# Altium PCB Proto_buttons.PcbDoc
Units mm, origin at the board's own origin, x right, y up, seen from the top; angles counter-clockwise.
Board outline 150 x 40 mm, 4 copper layers (Top Layer, Layer 2, Layer 3, Bottom Layer), stack 1.511 mm thick; 51 components, 24 nets, 166 pads, 29 vias.
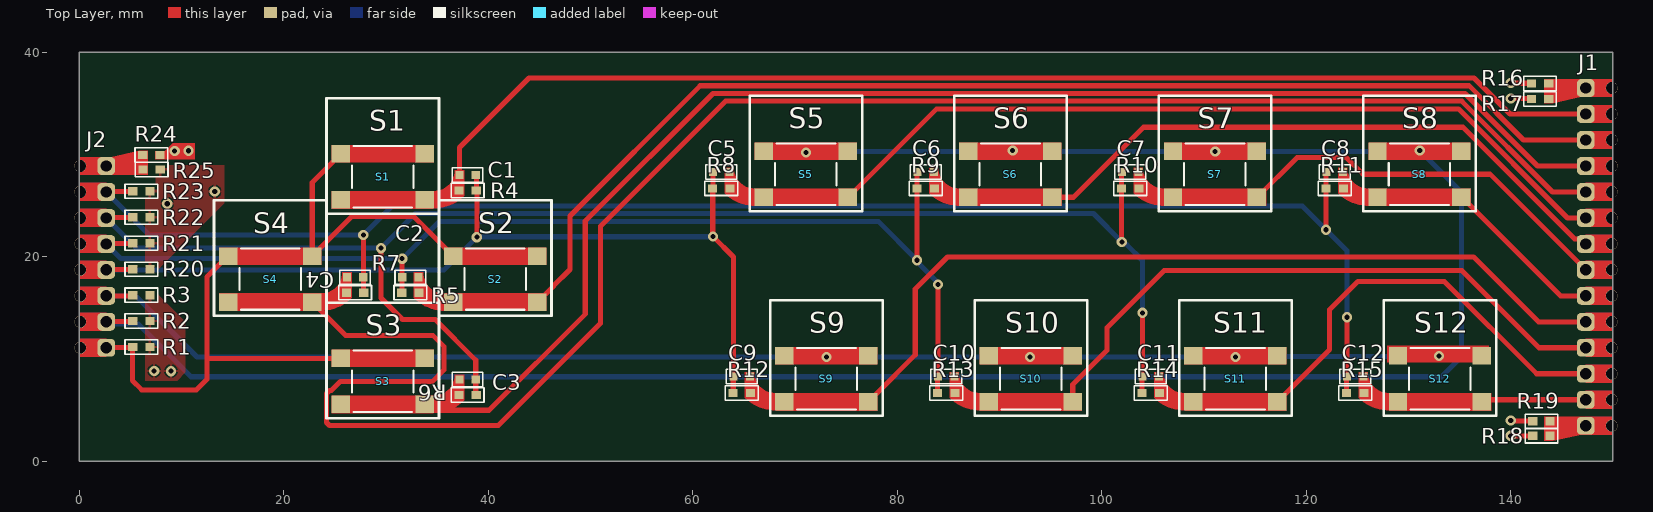
[diagram p0: Top Layer view]
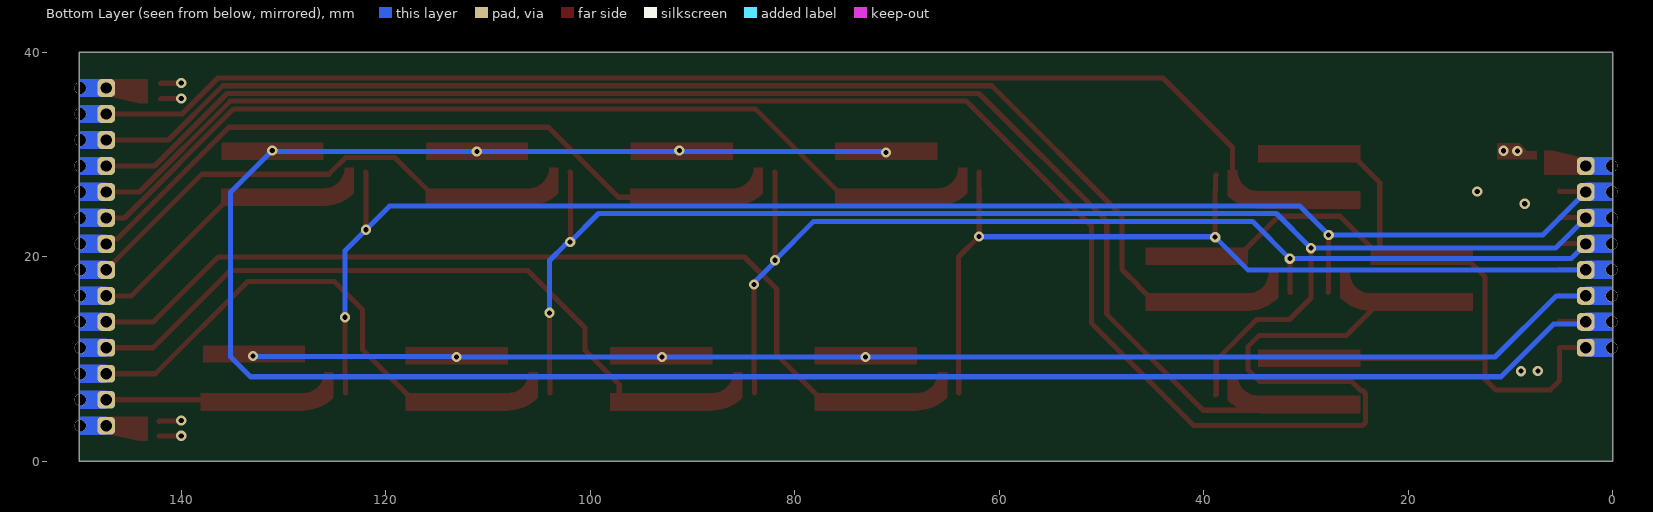
[diagram p1: Bottom Layer view, seen from below]
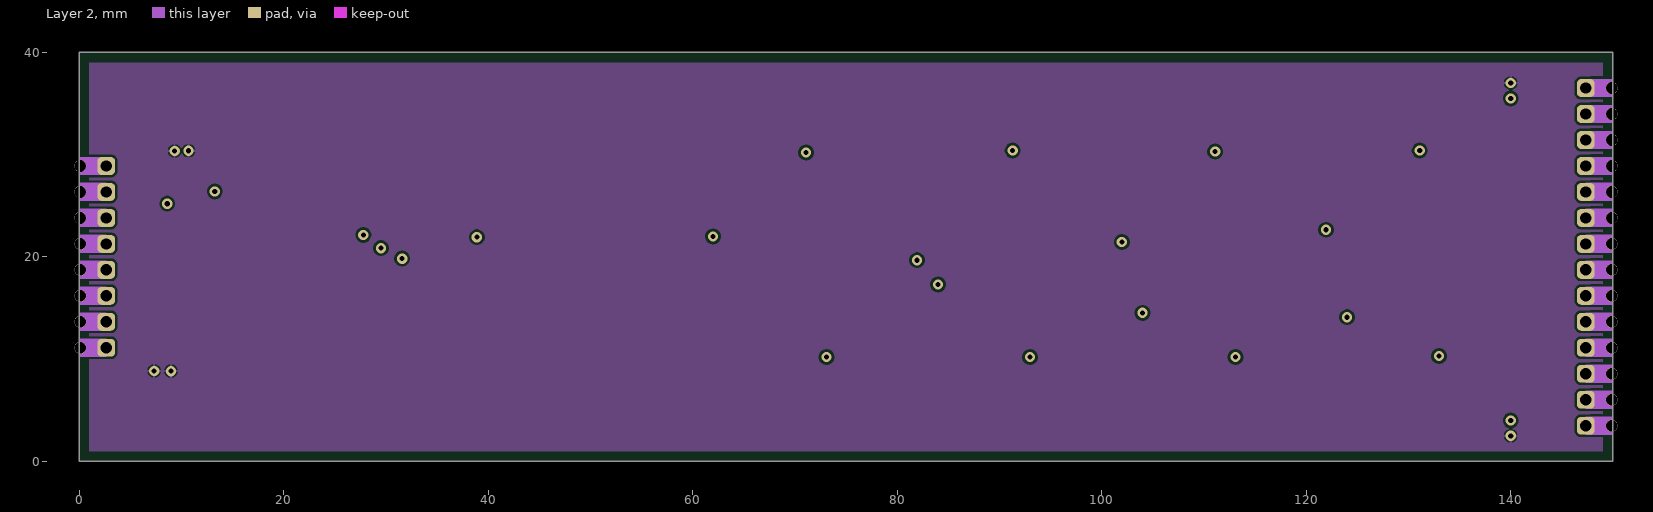
[diagram p2: Layer 2]
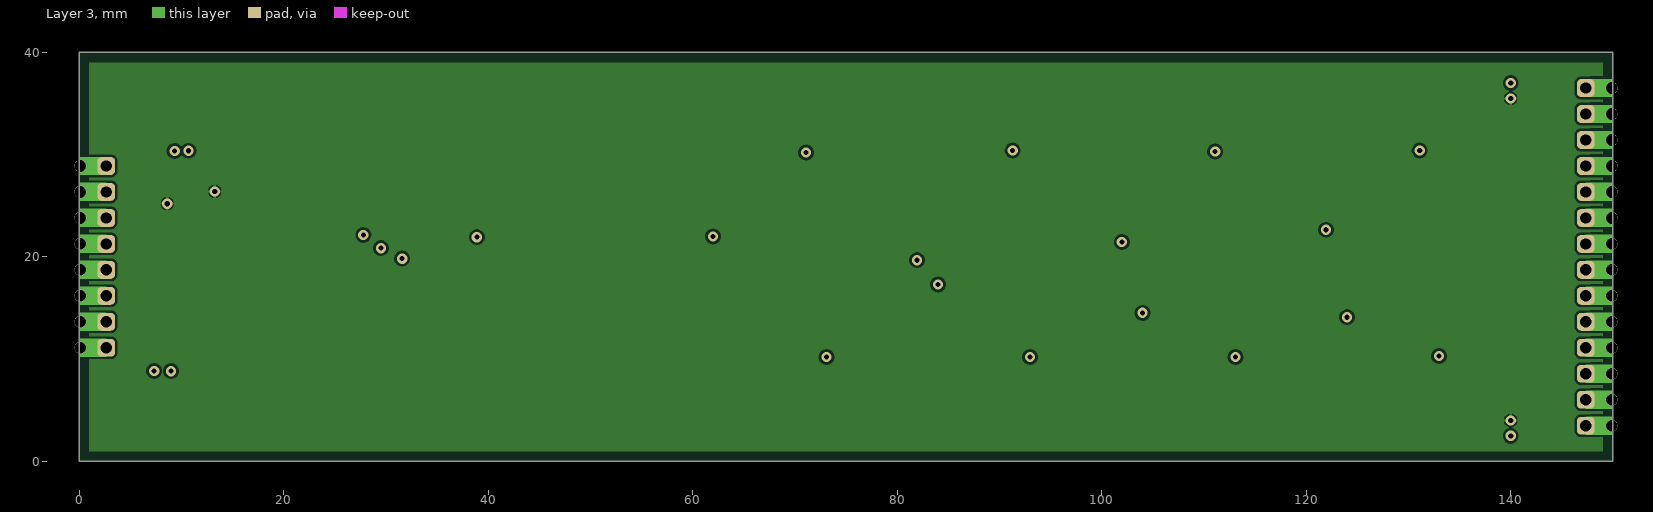
[diagram p3: Layer 3]
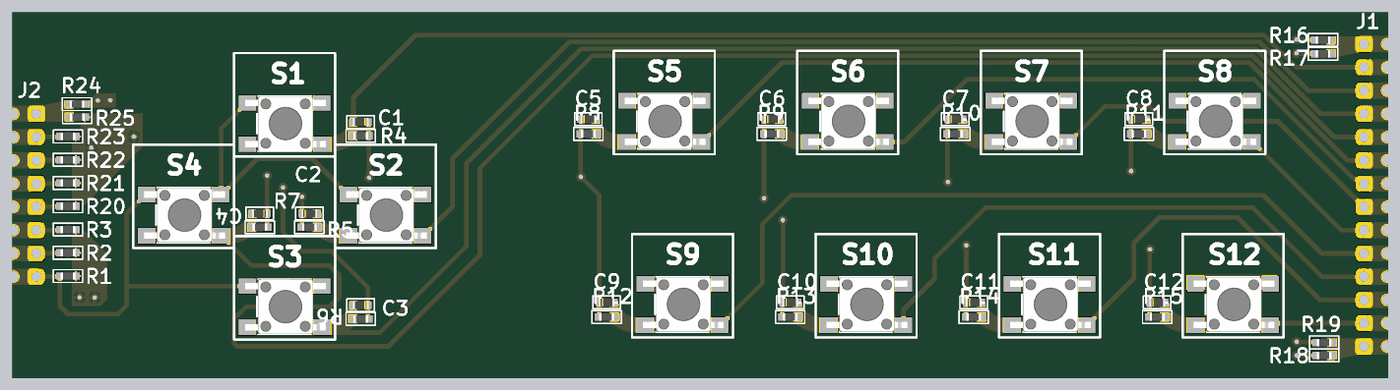
[diagram p4: 3D render of the assembled board from above, using the file's embedded part models]

## Layer stack, top to bottom
Top Solder: solder mask 0.0152, Solder Resist, Dk 3.5
Top Layer: signal copper 0.0432
Dielectric 1: prepreg 0.1999, FR-4, Dk 3.61
Layer 2: signal copper 0.0173
Core: core 0.9906, FR-4, Dk 3.61
Layer 3: signal copper 0.0173
Dielectric 2: prepreg 0.1999, FR-4, Dk 3.61
Bottom Layer: signal copper 0.0432
Board Layer Stack Bottom Solder: solder mask 0.0152, Solder Resist, Dk 3.5

## Board outline
0,0 150,0 150,40 0,40

## Design rules (kind name [scope] priority, off if disabled: settings)
Clearance [All] p1: gap=0.254 ignorepadtopadclearanceinfootprint=FALSE
PolygonConnect [All] p1: connectstyle=Relief reliefconductorwidth=0.254 reliefentries=4 polygonreliefangle="90 Angle" airgapwidth=0.254
RoutingVias [All] p1: holewidth=0.711 width=1.27 viastyle="Through Hole" minholewidth=0.711 minwidth=1.27 maxholewidth=0.711 maxwidth=1.27
SolderMaskExpansion [All] p1: expansion=0.102 istentingtop=FALSE
SupplyNets "Schematic Supply Nets_2" [InNet('GND')] p1: voltage=0.000
SupplyNets "Schematic Supply Nets_1" [InNet('+5')] p2: voltage=0.000
Width [All] p1: maxlimit=2 minlimit=0.254 preferedwidth=1
30 further rules are at their usual default settings.

## Components (designator, comment, footprint, x,y, rotation, side; value= is the part's Value field where it differs from the comment)
C1 "Capacitor" TDK_CC0603_N 38,28 r180 top value=1p
C2 "Capacitor" TDK_CC0603_N 32.4,18 r0 top value=1p
C3 "Capacitor" TDK_CC0603_N 38,8 r180 top value=1p
C4 "Capacitor" TDK_CC0603_N 27,18 r180 top value=1p
C5 "Capacitor" TDK_CC0603_N 62.8,28.3 r0 top value=1p
C6 "Capacitor" TDK_CC0603_N 82.8,28.3 r0 top value=1p
C7 "Capacitor" TDK_CC0603_N 102.8,28.3 r0 top value=1p
C8 "Capacitor" TDK_CC0603_N 122.8,28.3 r0 top value=1p
C9 "Capacitor" TDK_CC0603_N 64.8,8.3 r0 top value=1p
C10 "Capacitor" TDK_CC0603_N 84.8,8.3 r0 top value=1p
C11 "Capacitor" TDK_CC0603_N 104.8,8.3 r0 top value=1p
C12 "Capacitor" TDK_CC0603_N 124.8,8.3 r0 top value=1p
J1 "14 Pin RA Connector" "14pin-Edge Connector" 150,20 r0 top
J2 "8 Pin RA Connector" "8pin-Edge Connector" 0,20 r180 top
R1 "Resistor" Yageo_0603 6.096,11.176 r180 top value=0
R2 "Resistor" Yageo_0603 6.096,13.716 r180 top value=0
R3 "Resistor" Yageo_0603 6.096,16.256 r180 top value=0
R4 "Resistor" Yageo_0603 38,26.5 r0 top value=1K
R5 "Resistor" Yageo_0603 32.4,16.5 r180 top value=1K
R6 "Resistor" Yageo_0603 38,6.5 r0 top value=1K
R7 "Resistor" Yageo_0603 27,16.5 r0 top value=1K
R8 "Resistor" Yageo_0603 62.8,26.7 r180 top value=1K
R9 "Resistor" Yageo_0603 82.8,26.7 r180 top value=1K
R10 "Resistor" Yageo_0603 102.8,26.7 r180 top value=1K
R11 "Resistor" Yageo_0603 122.8,26.7 r180 top value=1K
R12 "Resistor" Yageo_0603 64.8,6.7 r180 top value=1K
R13 "Resistor" Yageo_0603 84.8,6.7 r180 top value=1K
R14 "Resistor" Yageo_0603 104.8,6.7 r180 top value=1K
R15 "Resistor" Yageo_0603 124.8,6.7 r180 top value=1K
R16 "Resistor" Yageo_0603 142.868,36.964 r180 top value=0
R17 "Resistor" Yageo_0603 142.868,35.44 r0 top value=0
R18 "Resistor" Yageo_0603 143,2.5 r0 top value=0
R19 "Resistor" Yageo_0603 143,3.925 r0 top value=0
R20 "Resistor" Yageo_0603 6.096,18.796 r0 top value=0
R21 "Resistor" Yageo_0603 6.096,21.336 r0 top value=0
R22 "Resistor" Yageo_0603 6.096,23.876 r0 top value=0
R23 "Resistor" Yageo_0603 6.096,26.416 r0 top value=0
R24 "Resistor" Yageo_0603 7.075,29.95 r180 top value=0
R25 "Resistor" Yageo_0603 7.1,28.55 r180 top value=0
S1 "Switch Normally Opened" SW_SWT0310-043016GSA_REVA 29.702,27.83 r0 top
S2 "Switch Normally Opened" SW_SWT0310-043016GSA_REVA 40.702,17.83 r0 top
S3 "Switch Normally Opened" SW_SWT0310-043016GSA_REVA 29.702,7.83 r0 top
S4 "Switch Normally Opened" SW_SWT0310-043016GSA_REVA 18.702,17.83 r0 top
S5 "Switch Normally Opened" SW_SWT0310-043016GSA_REVA 71.074,28.076 r0 top
S6 "Switch Normally Opened" SW_SWT0310-043016GSA_REVA 91.074,28.076 r0 top
S7 "Switch Normally Opened" SW_SWT0310-043016GSA_REVA 111.074,28.076 r0 top
S8 "Switch Normally Opened" SW_SWT0310-043016GSA_REVA 131.074,28.076 r0 top
S9 "Switch Normally Opened" SW_SWT0310-043016GSA_REVA 73.074,8.076 r0 top
S10 "Switch Normally Opened" SW_SWT0310-043016GSA_REVA 93.074,8.076 r0 top
S11 "Switch Normally Opened" SW_SWT0310-043016GSA_REVA 113.074,8.076 r0 top
S12 "Switch Normally Opened" SW_SWT0310-043016GSA_REVA 133.074,8.076 r0 top

## Footprints (in the part's own frame and the unit in brackets; to place one, negate y for a bottom-side part, rotate by r counter-clockwise, add the part's x,y. Pads: shape width x height; smd on the part's side, far side on the other; paste and mask are expansions set on the pad)
"8pin-Edge Connector" [mil] "Board edge connector for PCB to PCB mounting"
  rrect50% 68.9x68.9 hole 43.31: 1(-105,350) 2(-105,250) 3(-105,150) 4(-105,50) 5(-105,-50) 6(-105,-150) 7(-105,-250) 8(-105,-350)
  round 46 hole 45: 1(-5,350) 2(-5,250) 3(-5,150) 4(-5,50) 5(-5,-50) 6(-5,-150) 7(-5,-250) 8(-5,-350)
  Top Layer region: -105,115.55 -105,184.45 0,184.45 0,115.55
  Top Layer region: -105,215.55 -105,284.45 0,284.45 0,215.55
  Top Layer region: -105,315.55 -105,384.45 0,384.45 0,315.55
  Top Layer region: -105,15.55 -105,84.45 0,84.45 0,15.55
  Top Layer region: -105,-84.45 -105,-15.55 0,-15.55 0,-84.45
  Top Layer region: -105,-184.45 -105,-115.55 0,-115.55 0,-184.45
  Top Layer region: -105,-284.45 -105,-215.55 0,-215.55 0,-284.45
  Top Layer region: -105,-384.45 -105,-315.55 0,-315.55 0,-384.45
  Layer 2 region: -105,115.55 -105,184.45 0,184.45 0,115.55
  Layer 2 region: -105,215.55 -105,284.45 0,284.45 0,215.55
  Layer 2 region: -105,315.55 -105,384.45 0,384.45 0,315.55
  Layer 2 region: -105,15.55 -105,84.45 0,84.45 0,15.55
  Layer 2 region: -105,-84.45 -105,-15.55 0,-15.55 0,-84.45
  Layer 2 region: -105,-184.45 -105,-115.55 0,-115.55 0,-184.45
  Layer 2 region: -105,-284.45 -105,-215.55 0,-215.55 0,-284.45
  Layer 2 region: -105,-384.45 -105,-315.55 0,-315.55 0,-384.45
  Layer 3 region: -105,115.55 -105,184.45 0,184.45 0,115.55
  Layer 3 region: -105,215.55 -105,284.45 0,284.45 0,215.55
  Layer 3 region: -105,315.55 -105,384.45 0,384.45 0,315.55
  Layer 3 region: -105,15.55 -105,84.45 0,84.45 0,15.55
  Layer 3 region: -105,-84.45 -105,-15.55 0,-15.55 0,-84.45
  Layer 3 region: -105,-184.45 -105,-115.55 0,-115.55 0,-184.45
  Layer 3 region: -105,-284.45 -105,-215.55 0,-215.55 0,-284.45
  Layer 3 region: -105,-384.45 -105,-315.55 0,-315.55 0,-384.45
  Bottom Layer region: -105,115.55 -105,184.45 0,184.45 0,115.55
  Bottom Layer region: -105,215.55 -105,284.45 0,284.45 0,215.55
  Bottom Layer region: -105,315.55 -105,384.45 0,384.45 0,315.55
  Bottom Layer region: -105,15.55 -105,84.45 0,84.45 0,15.55
  Bottom Layer region: -105,-84.45 -105,-15.55 0,-15.55 0,-84.45
  Bottom Layer region: -105,-184.45 -105,-115.55 0,-115.55 0,-184.45
  Bottom Layer region: -105,-284.45 -105,-215.55 0,-215.55 0,-284.45
  Bottom Layer region: -105,-384.45 -105,-315.55 0,-315.55 0,-384.45
"14pin-Edge Connector" [mil] "Board edge connector for PCB to PCB mounting"
  rrect50% 68.9x68.9 hole 43.31: 1(-105,650) 2(-105,550) 3(-105,450) 4(-105,350) 5(-105,250) 6(-105,150) 7(-105,50) 8(-105,-50) 9(-105,-150) 10(-105,-250) 11(-105,-350) 12(-105,-450) 13(-105,-550) 14(-105,-650)
  round 46 hole 45: 1(-5,650) 2(-5,550) 3(-5,450) 4(-5,350) 5(-5,250) 6(-5,150) 7(-5,50) 8(-5,-50) 9(-5,-150) 10(-5,-250) 11(-5,-350) 12(-5,-450) 13(-5,-550) 14(-5,-650)
  Top Layer region: -105,-584.45 -105,-515.55 0,-515.55 0,-584.45
  Top Layer region: -105,-484.45 -105,-415.55 0,-415.55 0,-484.45
  Top Layer region: -105,-384.45 -105,-315.55 0,-315.55 0,-384.45
  Top Layer region: -105,-84.45 -105,-15.55 0,-15.55 0,-84.45
  Top Layer region: -105,15.55 -105,84.45 0,84.45 0,15.55
  Top Layer region: -105,115.55 -105,184.45 0,184.45 0,115.55
  Top Layer region: -105,215.55 -105,284.45 0,284.45 0,215.55
  Top Layer region: -105,315.55 -105,384.45 0,384.45 0,315.55
  Top Layer region: -105,415.55 -105,484.45 0,484.45 0,415.55
  Top Layer region: -105,515.55 -105,584.45 0,584.45 0,515.55
  Top Layer region: -105,615.55 -105,684.45 0,684.45 0,615.55
  Top Layer region: -105,-184.45 -105,-115.55 0,-115.55 0,-184.45
  Top Layer region: -105,-684.45 -105,-615.55 0,-615.55 0,-684.45
  Top Layer region: -105,-284.45 -105,-215.55 0,-215.55 0,-284.45
  Layer 2 region: -105,-584.45 -105,-515.55 0,-515.55 0,-584.45
  Layer 2 region: -105,-484.45 -105,-415.55 0,-415.55 0,-484.45
  Layer 2 region: -105,-384.45 -105,-315.55 0,-315.55 0,-384.45
  Layer 2 region: -105,-84.45 -105,-15.55 0,-15.55 0,-84.45
  Layer 2 region: -105,15.55 -105,84.45 0,84.45 0,15.55
  Layer 2 region: -105,115.55 -105,184.45 0,184.45 0,115.55
  Layer 2 region: -105,215.55 -105,284.45 0,284.45 0,215.55
  Layer 2 region: -105,315.55 -105,384.45 0,384.45 0,315.55
  Layer 2 region: -105,415.55 -105,484.45 0,484.45 0,415.55
  Layer 2 region: -105,515.55 -105,584.45 0,584.45 0,515.55
  Layer 2 region: -105,615.55 -105,684.45 0,684.45 0,615.55
  Layer 2 region: -105,-184.45 -105,-115.55 0,-115.55 0,-184.45
  Layer 2 region: -105,-684.45 -105,-615.55 0,-615.55 0,-684.45
  Layer 2 region: -105,-284.45 -105,-215.55 0,-215.55 0,-284.45
  Layer 3 region: -105,-584.45 -105,-515.55 0,-515.55 0,-584.45
  Layer 3 region: -105,-484.45 -105,-415.55 0,-415.55 0,-484.45
  Layer 3 region: -105,-384.45 -105,-315.55 0,-315.55 0,-384.45
  Layer 3 region: -105,-84.45 -105,-15.55 0,-15.55 0,-84.45
  Layer 3 region: -105,15.55 -105,84.45 0,84.45 0,15.55
  Layer 3 region: -105,115.55 -105,184.45 0,184.45 0,115.55
  Layer 3 region: -105,215.55 -105,284.45 0,284.45 0,215.55
  Layer 3 region: -105,315.55 -105,384.45 0,384.45 0,315.55
  Layer 3 region: -105,415.55 -105,484.45 0,484.45 0,415.55
  Layer 3 region: -105,515.55 -105,584.45 0,584.45 0,515.55
  Layer 3 region: -105,615.55 -105,684.45 0,684.45 0,615.55
  Layer 3 region: -105,-184.45 -105,-115.55 0,-115.55 0,-184.45
  Layer 3 region: -105,-684.45 -105,-615.55 0,-615.55 0,-684.45
  Layer 3 region: -105,-284.45 -105,-215.55 0,-215.55 0,-284.45
  Bottom Layer region: -105,-584.45 -105,-515.55 0,-515.55 0,-584.45
  Bottom Layer region: -105,-484.45 -105,-415.55 0,-415.55 0,-484.45
  Bottom Layer region: -105,-384.45 -105,-315.55 0,-315.55 0,-384.45
  Bottom Layer region: -105,-84.45 -105,-15.55 0,-15.55 0,-84.45
  Bottom Layer region: -105,15.55 -105,84.45 0,84.45 0,15.55
  Bottom Layer region: -105,115.55 -105,184.45 0,184.45 0,115.55
  Bottom Layer region: -105,215.55 -105,284.45 0,284.45 0,215.55
  Bottom Layer region: -105,315.55 -105,384.45 0,384.45 0,315.55
  Bottom Layer region: -105,415.55 -105,484.45 0,484.45 0,415.55
  Bottom Layer region: -105,515.55 -105,584.45 0,584.45 0,515.55
  Bottom Layer region: -105,615.55 -105,684.45 0,684.45 0,615.55
  Bottom Layer region: -105,-184.45 -105,-115.55 0,-115.55 0,-184.45
  Bottom Layer region: -105,-684.45 -105,-615.55 0,-615.55 0,-684.45
  Bottom Layer region: -105,-284.45 -105,-215.55 0,-215.55 0,-284.45
SW_SWT0310-043016GSA_REVA [mm] "Modified Snapmagic footprint"
  rect 1.8x1.7 smd paste+0 mask+0.102: 1(-4.1,2.25) 1(4.1,2.25) 2(-4.1,-2.25) 2(4.1,-2.25)
  silkscreen extent -5.5,-3.6 5.5,7.7, body extent -4.3,-3 4.5,3, height 4.36
TDK_CC0603_N [mm] "Standard TDK mid-voltage MLCC 0603 footprint, medium density courtyard, origin at centre /  / Datasheet: (GC11010016) https://product.tdk.com/system/files/dam/doc/product/capacitor/ceramic/mlcc/specification/mlccspec_commercial_general_midvoltage_en.pdf"
  rect 0.8x0.8 smd: 1(-0.8,0) 2(0.8,0)
  silkscreen extent -1.5,-0.7 1.5,0.7, body extent -0.85,-0.44 0.85,0.44, height 0.89
Yageo_0603 [mm] "Standard 0603 footprint for Yageo Resistors, medium density courtyard, origin at centre of component. Dimensions from Chip Resistor Surface Mount doc from Yageo, found at https://www.yageo.com/upload/website/yageo_PYu-R_Mount_10_19050818_343.pdf"
  rect 0.9x0.8 smd: 1(-0.85,0) 2(0.85,0)
  silkscreen extent -1.6,-0.7 1.6,0.7, body extent -0.8,-0.4 0.8,0.4, height 0.56

## Part data
J1: Supplier Part Number 1=2073-SWT0310-043016GSACT-ND, Supplier 1=DigiKey
S1 S2 S3 S4 S5 S6 S7 S8 S9 S10 S11 S12: library part "SW NO", closed=0, Rclosed=1m, Ropen=1Meg, SimulationGenericComponent=True, Simulation ModelName=SPST_SWITCH, Simulation ModelText=".SUBCKT  SPST_Switch node1  node2  PARAMS:  / + closed=0      / + Rclosed=1m  / + Ropen=1Meg   / B1 int1 0 V={if(closed>0,1,0)} / S1 node1 node2 int1 0 Smod / .model Smod Vswitch(Ron={Rclosed} Roff={Ropen}) / .ends", Simulation PortMap=(1:1),(2:2)
C1 C2 C3 C4 C5 C6 C7 C8 C9 C10 C11 C12: SimulationGenericComponent=True, Simulation ModelName=C_Capacitor_Default, Simulation ModelText="C_Capacitor_Default 1 0 1p", Simulation PortMap=(1:1),(2:2)
R1 R2 R3 R4 R5 R6 R7 R8 R9 R10 R11 R12 R13 R14 R15 R16 R17 R18 R19 R20 R21 R22 R23 R24 R25: SimulationGenericComponent=True, TC1=0, TC2=0, Simulation ModelName=R_Resistor_Default, Simulation ModelText="R_Resistor_Default 1 0 1K", Simulation PortMap=(1:1),(2:2)

## Via types
v1: diameter 1, hole 0.5, Top Layer to Bottom Layer, tented both sides, 29 vias

## Nets (pads, with @x,y where several pads share a name; then routed paths per layer and width w, separated by ;. In a path a pad name is that pad's centre, name@x,y a point inside that pad or via, vN(x,y) a via of type N, cw(c..) or ccw(c..) an arc to the next point about the centre after c; other vN are vias at no path point)
+5: R1.1 R2.1 R3.1 R16.2 R18.1 R24.1 | length 4.2
  Top Layer w0.5: v1(140,2.5) R18.1 ; v1(140,37) 140.018,36.982 142,36.982 R16.2
  other v1: 9,8.825 7.35,8.85 9.35,30.35 10.7,30.375
Col1: C1.1 C5.1 C9.1 J2.4 R4.2 R8.2 R12.2 R20.1 | length 91.9
  Top Layer w0.5: J2.4@2.667,18.73 2.7,18.763 5.213,18.763 R20.1 ; C1.1 38.85,27.95 R4.2 38.9,26.45 v1(38.9,21.925) ; C5.1 62,26.75 R8.2 61.975,26.675 61.975,22.025 64,20 C9.1 63.975,8.275 63.975,6.725 R12.2
  Bottom Layer w0.5: J2.4@2.667,18.73 35.705,18.73 38.937,21.962 61.962,21.962 v1(62,22)
Col2: C2.1 C6.1 C10.1 J2.5 R5.2 R9.2 R13.2 R21.1 | length 111.4
  Top Layer w0.5: J2.5@2.667,21.27 2.7,21.303 5.213,21.303 R21.1 ; R5.2 31.6,16.55 C2.1 v1(31.6,19.825) ; v1(81.95,19.675) R9.2 81.95,28.25 C6.1 ; R13.2 83.95,8.25 C10.1 v1(84,17.3)
  Bottom Layer w0.5: J2.5@2.667,21.27 4.112,19.825 v1(31.6,19.825) 35.25,23.475 78.15,23.475 v1(81.95,19.675) 81.95,19.512 84,17.462 v1(84,17.3)
Col3: C3.1 C7.1 C11.1 J2.6 R6.2 R10.2 R14.2 R22.1 | length 148.4
  Top Layer w0.5: J2.6@2.667,23.81 2.7,23.843 5.213,23.843 R22.1 ; v1(29.525,20.85) 29.525,15.975 31.633,13.867 34.833,13.867 38.8,9.9 C3.1 38.8,6.55 R6.2 ; v1(101.975,21.45) 101.95,21.475 R10.2 101.95,28.25 C7.1 ; R14.2 103.95,8.25 C11.1 v1(104,14.525)
  Bottom Layer w0.5: J2.6@2.667,23.81 5.627,20.85 v1(29.525,20.85) 32.904,24.229 99.196,24.229 v1(101.975,21.45) 102.177,21.45 102.433,21.194 102.456,21.194 104,19.65 v1(104,14.525)
Col4: C4.1 C8.1 C12.1 J2.7 R7.2 R11.2 R15.2 R23.1 | length 153.9
  Top Layer w0.5: J2.7@2.667,26.35 2.7,26.383 5.213,26.383 R23.1 ; v1(27.8,22.15) C4.1 27.8,16.55 R7.2 ; v1(121.95,22.65) R11.2 121.95,28.25 C8.1 ; R15.2 123.95,8.25 C12.1 v1(124,14.1)
  Bottom Layer w0.5: J2.7@2.667,26.35 6.867,22.15 v1(27.8,22.15) 30.633,24.983 119.617,24.983 v1(121.95,22.65) 124,20.6 v1(124,14.1)
GND: R17.1 R19.1 R20.2 R21.2 R22.2 R23.2 R25.1 | length 4.2
  Top Layer w0.5: v1(140,4) 140.037,3.963 142.112,3.963 R19.1 ; v1(140,35.5) 140.03,35.47 141.988,35.47 R17.1
  other v1: 8.625,25.2 13.275,26.4
NetJ1_1: J1.1 R16.1 R17.2
NetJ1_14: J1.14 R18.2 R19.2
NetJ2_8: J2.8 R24.2 R25.2
PB1: C1.2 J1.2 R4.1 S1.2 | length 117.1
  Top Layer w0.5: C1.2 37.2,30.7 43.991,37.491 136.409,37.491 139.93,33.97 J1.2@147.333,33.97
PB2: C2.2 J1.3 R5.1 S2.2 | length 124.8
  Top Layer w0.5: S2.2@36.602,15.58 44.852,15.58 46.384,17.112 46.384,17.162 48,18.778 48,24 60.737,36.737 135.938,36.737 141.245,31.43 J1.3@147.333,31.43
PB3: C3.2 J1.4 R6.1 S3.2 | length 134.9
  Top Layer w0.5: S3.2@33.802,5.58 34.381,5 40.101,5 49.5,14.399 49.5,23.5 61.983,35.983 135.525,35.983 142.618,28.89 J1.4@147.333,28.89
PB4: C4.2 J1.5 R7.1 S4.2 | length 177.9
  Top Layer w0.5: S4.2@22.802,15.58 26.056,12.325 34.6,12.325 35.675,11.25 35.675,8.925 34.58,7.83 25.563,7.83 24.667,6.934 24.493,6.934 24.198,6.638 24.198,3.793 24.49,3.5 41,3.5 51,13.5 51,23 63.229,35.229 135.212,35.229 144.091,26.35 J1.5@147.333,26.35
PB5: C5.2 J1.6 R8.1 S5.2 | length 80.2
  Top Layer w0.5: S5.2@75.174,25.826 75.224,25.826 83.873,34.475 134.9,34.475 145.565,23.81 J1.6@147.333,23.81
PB6: C6.2 J1.7 R9.1 S6.2 | length 62.3
  Top Layer w0.5: S6.2@95.174,25.826 97.236,25.826 104.085,32.675 135.325,32.675 146.254,21.746 146.857,21.746 147.333,21.27 J1.7@149.873,21.27
PB7: C7.2 J1.8 R10.1 S7.2 | length 40.8
  Top Layer w0.5: S7.2@115.174,25.826 115.224,25.826 119.098,29.7 123.949,29.7 125.574,28.075 137.988,28.075 147.333,18.73 J1.8@149.873,18.73
PB8: C8.2 J1.9 R11.1 S8.2 | length 18.7
  Top Layer w0.5: S8.2@135.174,25.826 135.224,25.826 144.859,16.19 J1.9@149.873,16.19
PB9: C9.2 J1.10 R12.1 S9.2 | length 85
  Top Layer w0.5: S9.2@77.174,5.826 77.224,5.826 77.947,6.549 77.947,6.599 81.775,10.427 81.775,16.85 84.925,20 136.375,20 142.725,13.65 147.333,13.65 J1.10@149.873,13.65
PB10: C10.2 J1.11 R13.1 S10.2 | length 60.9
  Top Layer w0.5: S10.2@97.174,5.826 97.174,7.511 100.525,10.863 100.525,13.075 106.1,18.65 135.225,18.65 142.765,11.11 J1.11@147.333,11.11
PB11: C11.2 J1.12 R14.1 S11.2 | length 41.1
  Top Layer w0.5: S11.2@117.174,5.826 117.224,5.826 117.947,6.549 117.947,6.599 122.275,10.927 122.275,14.825 125.05,17.6 133.507,17.6 142.537,8.57 J1.12@147.333,8.57
PB12: C12.2 J1.13 R15.1 S12.2 | length 12.8
  Top Layer w0.5: S12.2@137.174,5.826 137.378,6.03 J1.13@149.873,6.03
Row1: J2.1 R1.2 S1.1 S2.1 S3.1 S4.1 | length 72.3
  Top Layer w0.5: J2.1@2.667,11.11 2.7,11.143 5.213,11.143 5.213,7.912 6.125,7 11.5,7 12.5,8 12.5,10.08 ; 18.702,20.08 14.552,20.08 12.5,18.028 12.5,10.08 ; S3.1@25.602,10.08 12.5,10.08 ; S1.1@25.602,30.08 25.552,30.08 24.829,29.357 24.829,29.307 22.802,27.28 22.802,20.08 22.852,20.08 23.575,20.803 23.575,20.853 26.692,23.97 32.711,23.97 35.829,20.853 35.829,20.803 36.552,20.08 S2.1@36.602,20.08
Row2: J2.2 R2.2 S5.1 S6.1 S7.1 S8.1 | length 222.3
  Top Layer w0.5: J2.2@2.667,13.65 2.7,13.683 5.213,13.683 R2.2
  Bottom Layer w0.5: J2.2@0.127,13.65 J2.2@2.333,13.65 ; J2.2@2.667,13.65 2.89,13.427 5.798,13.427 10.95,8.275 133.225,8.275 135.175,10.225 135.175,26.325 v1(131.1,30.4) 131,30.3 v1(111.1,30.3) 71.2,30.3 v1(71.1,30.2)
  other v1: 91.3,30.4
Row3: J2.3 R3.2 S9.1 S10.1 S11.1 S12.1 | length 138
  Top Layer w0.5: J2.3@0.127,16.19 5.18,16.19 R3.2
  Bottom Layer w0.5: J2.3@2.667,16.19 5.535,16.19 11.525,10.2 v1(73.1,10.2) v1(93,10.2) v1(113.1,10.2) 113.15,10.25 132.95,10.25 v1(133,10.3)

## Polygon pours and split planes (outlines as drawn)
+5 on Top Layer "+5_L01_P003" (solid, remove dead copper, pour order 3): 6.496,16.656 7.396,16.656 10.4,13.652 10.4,8.7 9.6,7.9 6.496,7.9
GND on Top Layer "GND_L01_P002" (solid, remove dead copper, pour order 2): 7.5,28.95 7.5,26.92 7.396,26.816 6.496,26.816 6.496,18.396 7.396,18.396 14.225,25.225 14.225,28.95
+5 on Layer 2 "+5_L02_P000" (solid, pour order 0): 1,39 1,1 149,1 149,39
GND on Layer 3 "GND_L03_P001" (solid, pour order 1): 1,39 1,1 149,1 149,39

## Other copper
Top Layer:
  rectangle net Row3: 127.9,9.65 137.9,11.35
  rectangle net Row3: 108.074,9.476 118.074,11.176
  rectangle net Row3: 88.074,9.476 98.074,11.176
  rectangle net Row3: 68.074,9.476 78.074,11.176
  rectangle net Row1: 24.702,9.23 34.702,10.93
  rectangle net Row1: 13.702,19.23 23.702,20.93
  rectangle net Row1: 24.702,29.23 34.702,30.93
  rectangle net Row1: 35.702,19.23 45.702,20.93
  rectangle net Row2: 66.074,29.476 76.074,31.176
  rectangle net Row2: 86.074,29.476 96.074,31.176
  rectangle net Row2: 106.074,29.476 116.074,31.176
  rectangle net Row2: 126.074,29.476 136.074,31.176
  region net PB9: 78.074,4.976 78.074,6.676 68.074,6.676 cw(c68.074,8.726) 66.024,8.726 65.124,8.726 65.124,6.226 ccw(c68.141,9.243) 68.141,4.976
  region net PB4: 13.702,14.73 13.702,16.43 23.702,16.43 ccw(c23.702,18.48) 25.752,18.48 26.652,18.48 26.652,15.98 cw(c23.634,18.997) 23.634,14.73
  region net PB2: 45.702,14.73 45.702,16.43 35.702,16.43 cw(c35.702,18.48) 33.652,18.48 32.752,18.48 32.752,15.98 ccw(c35.769,18.997) 35.769,14.73
  region net PB11: 118.074,4.976 118.074,6.676 108.074,6.676 cw(c108.074,8.726) 106.024,8.726 105.124,8.726 105.124,6.226 ccw(c108.141,9.243) 108.141,4.976
  region net PB3: 24.702,4.73 24.702,6.43 34.702,6.43 ccw(c34.702,8.48) 36.752,8.48 37.652,8.48 37.652,5.98 cw(c34.634,8.997) 34.634,4.73
  region net PB1: 24.702,24.73 24.702,26.43 34.702,26.43 ccw(c34.702,28.48) 36.752,28.48 37.652,28.48 37.652,25.98 cw(c34.634,28.997) 34.634,24.73
  region net PB5: 76.074,24.976 76.074,26.676 66.074,26.676 cw(c66.074,28.726) 64.024,28.726 63.124,28.726 63.124,26.226 ccw(c66.141,29.243) 66.141,24.976
  region net PB6: 96.074,24.976 96.074,26.676 86.074,26.676 cw(c86.074,28.726) 84.024,28.726 83.124,28.726 83.124,26.226 ccw(c86.141,29.243) 86.141,24.976
  region net PB7: 116.074,24.976 116.074,26.676 106.074,26.676 cw(c106.074,28.726) 104.024,28.726 103.124,28.726 103.124,26.226 ccw(c106.141,29.243) 106.141,24.976
  region net PB8: 136.074,24.976 136.074,26.676 126.074,26.676 cw(c126.074,28.726) 124.024,28.726 123.124,28.726 123.124,26.226 ccw(c126.141,29.243) 126.141,24.976
  region net PB12: 138.074,4.976 138.074,6.676 128.074,6.676 cw(c128.074,8.726) 126.024,8.726 125.124,8.726 125.124,6.226 ccw(c128.141,9.243) 128.141,4.976
  region net PB10: 98.074,4.976 98.074,6.676 88.074,6.676 cw(c88.074,8.726) 86.024,8.726 85.124,8.726 85.124,6.226 ccw(c88.141,9.243) 88.141,4.976
  region net +5: 7.475,29.55 11.298,29.55 11.298,31.125 9.15,31.125 8.375,30.35 7.475,30.35
  region net NetJ2_8: 1.018,29.765 3.104,29.765 5.832,30.36 6.732,30.36 6.732,28.036 5.832,28.036 2.667,28.036 1.018,28.036
  region net NetJ1_14: 148.982,2.615 146.895,2.615 144.168,2.02 143.268,2.02 143.268,4.344 144.168,4.344 147.333,4.344 148.982,4.344
  region net NetJ1_1: 148.982,35.635 146.895,35.635 144.168,35.04 143.268,35.04 143.268,37.364 144.168,37.364 147.333,37.364 148.982,37.364